# Altium PCB PCB2.PcbDoc
Units mil, origin at the board's own origin, x right, y up, seen from the top; angles counter-clockwise.
Board outline 6000 x 4000 mil, 2 copper layers (Top Layer, Bottom Layer); 2 components, 15 nets, 30 pads, 36 vias.
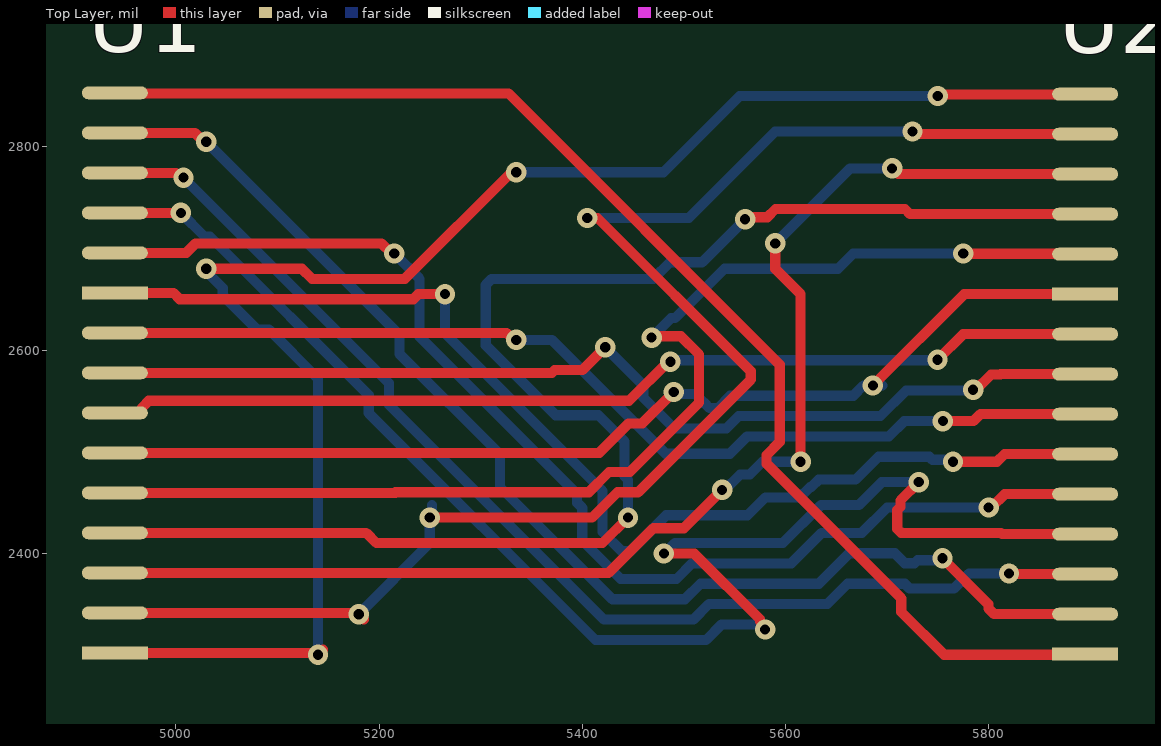
[diagram p0: Top Layer view]
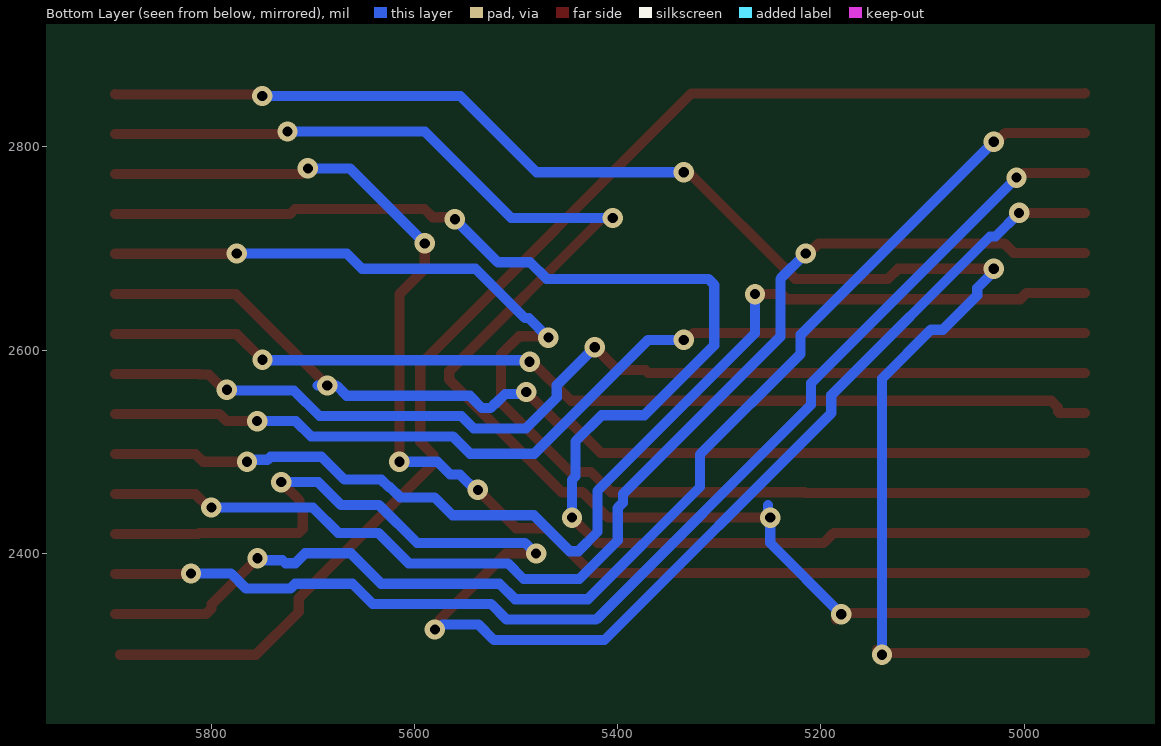
[diagram p1: Bottom Layer view, seen from below]

## Layer stack, top to bottom
Top Solder: solder mask 0.4, Solder Resist, Dk 3.5
Top Layer: signal copper 1.4
Dielectric 1: dielectric 12.6, FR-4, Dk 4.8
Bottom Layer: signal copper 1.4
Bottom Solder: solder mask 0.4, Solder Resist, Dk 3.5

## Board outline
1000,1000 7000,1000 7000,5000 1000,5000

## Design rules (kind name [scope] priority, off if disabled: settings)
Clearance [All] p1: gap=10 ignorepadtopadclearanceinfootprint=FALSE except(0: Arc-Hole Track-Hole SMDPad-Hole THPad-Hole Via-Hole Fill-Hole Poly-Hole Region-Hole Text-Hole)
PolygonConnect [All] p1: connectstyle=Relief reliefconductorwidth=10 reliefentries=4 polygonreliefangle="90 Angle" airgapwidth=10
RoutingVias [All] p1: holewidth=28 width=50 viastyle="Through Hole" minholewidth=28 minwidth=50 maxholewidth=28 maxwidth=50
SolderMaskExpansion [All] p1: expansion=4 istentingtop=FALSE
Width [All] p1: maxlimit=10 minlimit=10 preferedwidth=10
30 further rules are at their usual default settings.

## Components (designator, comment, footprint, x,y, rotation, side; value= is the part's Value field where it differs from the comment)
U1 "Component_1" 15pin_1mm_FPC 4815,2301.93 r90 top
U2 "Component_1" 15pin_1mm_FPC 5770,2300.67 r90 top

## Footprints (in the part's own frame and the unit in brackets; to place one, negate y for a bottom-side part, rotate by r counter-clockwise, add the part's x,y. Pads: shape width x height; smd on the part's side, far side on the other; paste and mask are expansions set on the pad)
15pin_1mm_FPC [mm]
  rect 0.32x1.65 smd: 1(0,-3.175) 10(9,-3.175)
  oval 0.32x1.65 smd: 2(1,-3.175) 3(2,-3.175) 4(3,-3.175) 5(4,-3.175) 6(5,-3.175) 7(6,-3.175) 8(7,-3.175) 9(8,-3.175) 11(10,-3.175) 12(11,-3.175) 13(12,-3.175) 14(13,-3.175) 15(14,-3.175)

## Via types
v1: diameter 20, hole 10, Top Layer to Bottom Layer, 36 vias

## Nets (pads, with @x,y where several pads share a name; then routed paths per layer and width w, separated by ;. In a path a pad name is that pad's centre, name@x,y a point inside that pad or via, vN(x,y) a via of type N, cw(c..) or ccw(c..) an arc to the next point about the centre after c; other vN are vias at no path point)
CAM_C_N: U1.8 U2.8 | length 1027.6
  Top Layer w10: U1.8 5370.18,2577.52 5372.84,2580.18 5400.18,2580.18 v1(5422.68,2602.68) ; v1(5784.75,2560.85) 5787.45,2560.85 5802.49,2575.88 5811.54,2575.88 5811.92,2576.26 U2.8
  Bottom Layer w10: v1(5422.68,2602.68) 5460.08,2565.28 5460.08,2553.32 5490.56,2522.84 5541.89,2522.84 5554.05,2535 5693.64,2535 5718.64,2560 5783.9,2560 v1(5784.75,2560.85)
CAM_C_P: U1.9 U2.7 | length 1020.5
  Top Layer w10: U1.9 5325.4,2616.89 5332.29,2610 v1(5335,2610) ; v1(5755,2530) 5785,2530 5791.89,2536.89 U2.7
  Bottom Layer w10: v1(5335,2610) 5370,2610 5482.16,2497.84 5545.18,2497.84 5562.34,2515 5701.92,2515 5716.92,2530 v1(5755,2530)
CAM_D0_N: U1.2 U2.14 | length 1508.8
  Top Layer w10: U1.2 5178.7,2341.3 v1(5180,2340) v1@5185,2335 ; v1(5250,2435) 5409.64,2435 5434.64,2460 5455,2460 5565.86,2570.86 5565.86,2579.14 5415,2730 v1@5410,2730 ; v1(5725,2815) 5727.71,2815 5730.23,2812.48 U2.14
  Bottom Layer w10: v1(5180,2340) 5250,2410 v1(5250,2435) ; v1@5252.21,2435 5252.21,2447.21 ; v1(5405,2730) 5505,2730 5590,2815 v1(5725,2815)
CAM_D0_P: U1.3 U2.13 | length 1283.6
  Top Layer w10: U1.3 5426.02,2380.67 5470,2424.64 5500,2424.64 v1(5537.68,2462.32) ; v1(5590,2705) 5590,2680 5615,2655 v1(5615,2490) ; v1(5705,2778.78) 5710.67,2773.11 U2.13
  Bottom Layer w10: v1(5537.68,2462.32) 5540.38,2462.32 5555.53,2477.47 5564.96,2477.47 5577.49,2490 v1(5615,2490) ; v1(5590,2705) 5663.78,2778.78 v1(5705,2778.78)
CAM_D1_N: U1.5 U2.11 | length 1175.1
  Top Layer w10: U1.5 5215.9,2459.41 5216.49,2460 5406.36,2460 5426.36,2480 5446.72,2480 5515.06,2548.34 5515.06,2595.55 5497.09,2613.51 5469.63,2613.51 v1(5468.3,2612.18) ; v1(5775,2695) 5775.31,2694.69 5894.69,2694.69 U2.11
  Bottom Layer w10: v1(5468.3,2612.18) 5487.58,2631.45 5491.45,2631.45 5540,2680 5651.76,2680 5666.76,2695 v1(5775,2695)
CAM_D1_P: U1.6 U2.10 | length 1042.2
  Top Layer w10: U1.6 5416.86,2498.78 5445.86,2527.78 5459.14,2527.78 v1(5490.06,2558.7) ; v1(5686.04,2565) 5776.04,2655 U2.10
  Bottom Layer w10: v1(5490.06,2558.7) 5491.97,2556.78 5510.92,2556.78 5520.06,2547.64 5520.52,2547.64 5525.32,2542.84 5533.61,2542.84 5545.77,2555 5666.72,2555 5676.72,2565 v1@5695.36,2565
DGND1: U1.1 U2.15 | length 1583.2
  Top Layer w10: U1.1 5141.93,2301.93 v1@5145,2305 ; v1(5030,2680) 5124.03,2680 5134.03,2670 5225.36,2670 5330.36,2775 v1(5335,2775) ; v1(5750,2850) 5751.35,2851.35 5894.5,2851.35 U2.15
  Bottom Layer w10: v1(5030,2680) 5030,2677.29 5046.21,2661.08 5046.21,2653.79 5080.1,2619.9 5091.81,2619.9 5140,2571.72 v1(5140,2300) ; v1(5335,2775) 5480,2775 5555,2850 v1(5750,2850)
DGND2: U1.4 U2.12 | length 1454.3
  Top Layer w10: U1.4 5187.32,2420.04 5197.36,2410 5420,2410 v1(5445,2435) ; v1(5560.36,2728.78) 5562.27,2730.69 5582.09,2730.69 5590.18,2738.78 5717.64,2738.78 5722.68,2733.74 U2.12
  Bottom Layer w10: v1(5445,2435) 5445,2472.21 5441.72,2475.5 5441.72,2510 5415.94,2535.78 5373.87,2535.78 5305,2604.64 5305,2664.14 5310.86,2670 5470,2670 5486.46,2686.46 5518.04,2686.46 v1(5560.36,2728.78)
DGND3: U1.7 U2.9 | length 989.4
  Top Layer w10: U1.7 4965.48,2538.15 4966.68,2539.35 4966.68,2543.34 4973.34,2550 5446.01,2550 5484.52,2588.51 v1(5486.74,2588.51) ; v1(5749.64,2590.36) 5774.91,2615.63 U2.9
  Bottom Layer w10: v1(5486.74,2588.51) 5488.22,2590 5749.28,2590 v1(5749.64,2590.36)
DGND4: U1.10 U2.6 | length 1154.6
  Top Layer w10: U1.10 4997.64,2656.26 5003.9,2650 5233.64,2650 5238.64,2655 v1(5265,2655) ; v1(5765,2490.09) 5765.09,2490 5808.05,2490 5815.57,2497.52 U2.6
  Bottom Layer w10: v1(5265,2655) 5265,2616.36 5420,2461.36 5420,2420.85 5438.96,2401.89 5447.25,2401.89 5482.68,2437.32 5562.68,2437.32 5580.36,2455 5614.22,2455 5624.39,2465.18 5625.53,2465.18 5632.79,2472.43 5669,2472.43 5691.57,2495 5741.61,2495 5744.61,2492 5763.09,2492 v1(5765,2490.09)
LED_EN: U1.12 U2.4 | length 1488.4
  Top Layer w10: U1.12 v1(5005,2735) ; v1(5480.36,2399.64) 5510.36,2399.64 5575,2335 5575,2332.71 5580,2327.71 v1(5580,2325) ; v1(5731.26,2470) 5713.23,2451.98 5713.23,2445.59 5710,2442.36 5710,2423.91 5713.91,2420 5770,2420 5812.06,2420 5813.28,2418.78 U2.4
  Bottom Layer w10: v1(5005,2735) 5028.28,2711.72 5033.63,2711.72 5189.85,2555.51 5189.85,2537.87 5413.07,2314.64 5521.94,2314.64 5537.29,2330 5572.29,2330 5577.29,2325 v1(5580,2325) ; v1(5480.36,2399.64) 5480.86,2399.64 5491.21,2410 5597.5,2410 5634.86,2447.36 5672.21,2447.36 5694.85,2470 v1(5731.26,2470)
POWER_3.3V: U1.15 U2.1 | length 1262.3
  Top Layer w10: U1.15 4940.5,2852.61 5327.39,2852.61 5594.47,2585.53 5594.47,2509.68 5581.54,2496.75 5581.54,2488.11 5714.05,2355.6 5714.05,2342.13 5756.18,2300 U2.1@5890,2300
POWER_EN: U1.11 U2.5 | length 1187.4
  Top Layer w10: U1.11 5010.27,2695.63 5019.64,2705 5202.29,2705 5212.29,2695 v1(5215,2695) ; v1(5800,2445) 5802.71,2445 5815.86,2458.15 U2.5
  Bottom Layer w10: v1(5215,2695) 5240,2670 5240,2613.08 5395,2458.08 5395,2449.64 5400,2444.64 5400,2412.57 5437.92,2374.64 5492.72,2374.64 5508.08,2390 5605.78,2390 5635.78,2420 5675.22,2420 5700.22,2445 v1(5800,2445)
SCL: U1.13 U2.3 | length 1172.6
  Top Layer w10: U1.13 5000.22,2774.37 5004.9,2769.69 v1(5007.61,2769.69) ; v1(5820,2380) 5820.3,2379.7 5894.7,2379.7 U2.3
  Bottom Layer w10: v1(5007.61,2769.69) 5209.85,2567.45 5209.85,2546.15 5421.35,2334.64 5509.29,2334.64 5524.64,2350 5641.14,2350 5661.14,2370 5717.48,2370 5722.3,2365.18 5765.76,2365.18 5780.58,2380 v1(5820,2380)
SDA: U1.14 U2.2 | length 1224.8
  Top Layer w10: U1.14 5018.55,2813.74 5027.29,2805 v1(5030,2805) ; v1(5754.64,2395) 5799.74,2349.9 5799.74,2345.9 5805.6,2340.04 U2.2
  Bottom Layer w10: v1(5030,2805) 5220,2615 5220,2596.36 5319.04,2497.32 5319.04,2465.24 5429.64,2354.64 5501.01,2354.64 5516.36,2370 5632.85,2370 5662.85,2400 5707.66,2400 5717.49,2390.18 5727.12,2390.18 5730.03,2393.09 5752.73,2393.09 v1(5754.64,2395)

## Silkscreen, mask and mechanical layers (free items; w line width, h text height)
Top Solder:
  rectangle: 5740,2134 5980,2285
  rectangle: 5745,2864 5985,3015
  rectangle: 4815,2864 5055,3015
  rectangle: 4805,2134 5045,2285